# EAGLE board 3xbaseI2C (EAGLE 7.7.0)
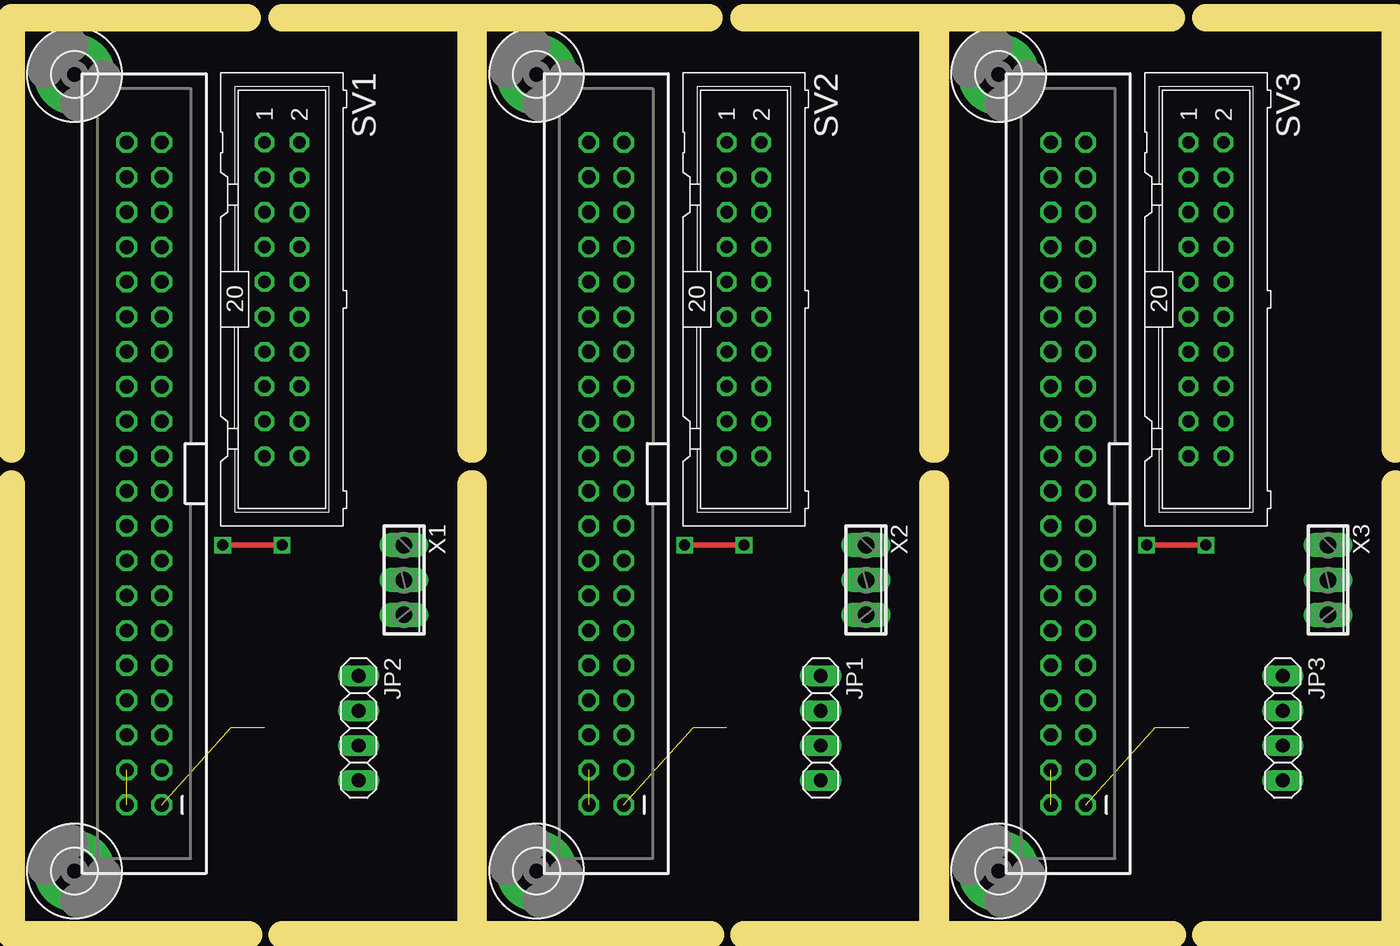
[diagram p0: board, top side]
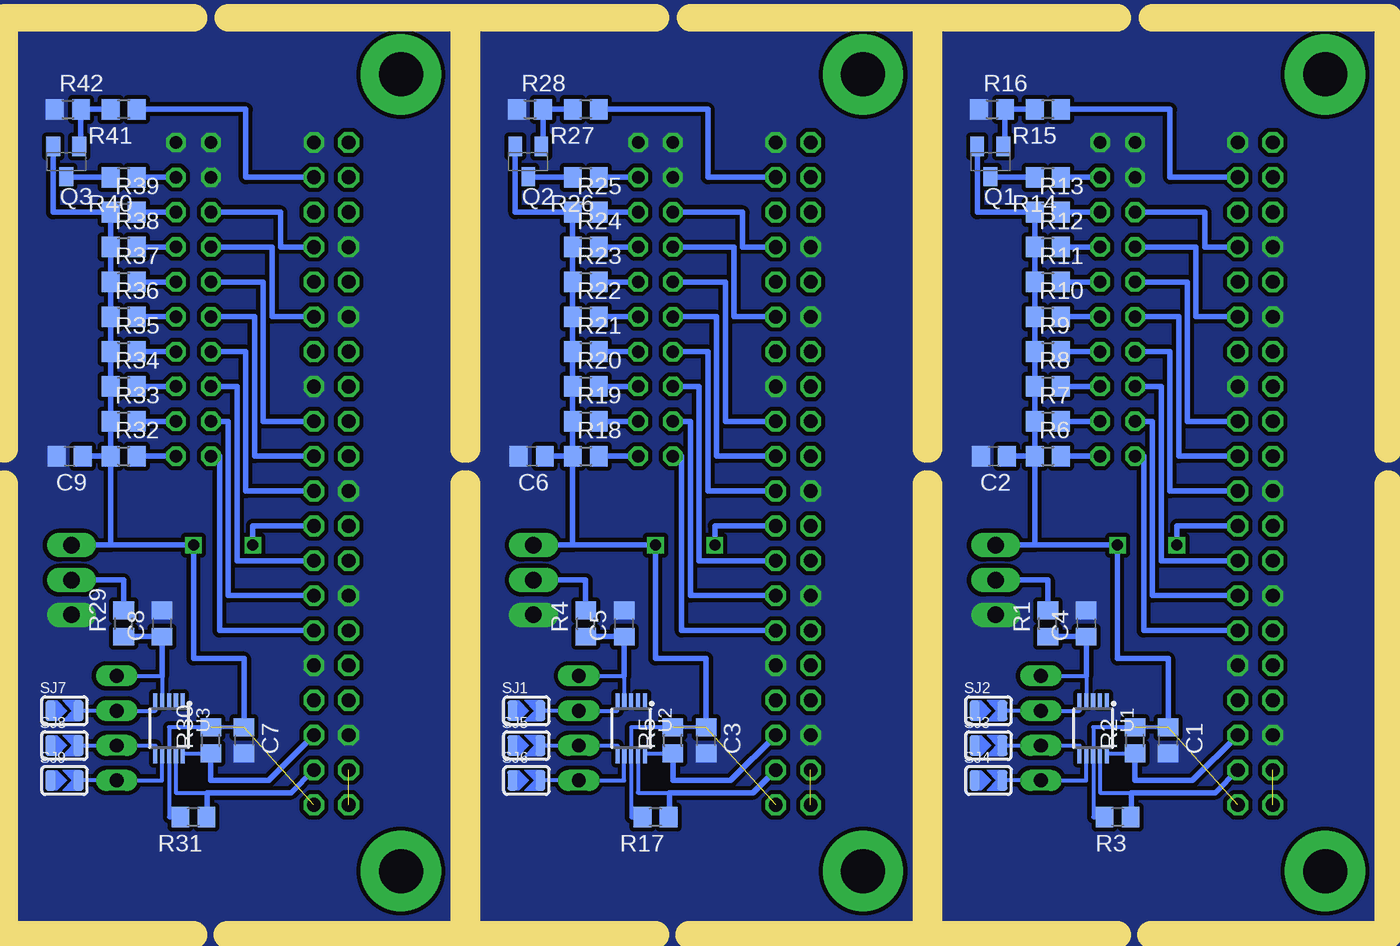
[diagram p1: board, bottom side, seen from below]

No outline drawn. Coordinates in mm, seen from the top.
Copper layers (1*16): Top 0.035mm / dielectric 1.5mm / Bottom 0.035mm
Design rules "default": minimum track width 10mil, minimum drill 24mil, track to track 8mil, track to pad 8mil, pad to pad 8mil, via to via 8mil, smd to smd 8mil, copper to edge 40mil, drill to drill 8mil, minimum pad ring 10mil, minimum via ring 8mil, stop-mask expansion 4mil, vias tented up to drill 0mil, thermal gap 10mil
Milling: 24 lines

## Footprints (pad centres in the part's own frame; a part is rotated, then mirrored left to right if it is on the bottom)
C0805 = smd 1.3 x 1.5: 1 -0.95,0; 2 0.95,0
3,2-PAD = drill 3.2 pad 5.842: B3,2 0,0
2X20-SHROUDED-THIN = drill 1 octagon: 1 -1.27,24.13; 2 1.27,24.13; 3 -1.27,21.59; 4 1.27,21.59; 5 -1.27,19.05; 6 1.27,19.05; 7 -1.27,16.51; 8 1.27,16.51; 9 -1.27,13.97; 10 1.27,13.97; 11 -1.27,11.43; 12 1.27,11.43; 13 -1.27,8.89; 14 1.27,8.89; 15 -1.27,6.35; 16 1.27,6.35; 17 -1.27,3.81; 18 1.27,3.81; 19 -1.27,1.27; 20 1.27,1.27; 21 -1.27,-1.27; 22 1.27,-1.27; 23 -1.27,-3.81; 24 1.27,-3.81; 25 -1.27,-6.35; 26 1.27,-6.35; 27 -1.27,-8.89; 28 1.27,-8.89; 29 -1.27,-11.43; 30 1.27,-11.43; 31 -1.27,-13.97; 32 1.27,-13.97; 33 -1.27,-16.51; 34 1.27,-16.51; 35 -1.27,-19.05; 36 1.27,-19.05; 37 -1.27,-21.59; 38 1.27,-21.59; 39 -1.27,-24.13; 40 1.27,-24.13
1X04 = drill 1.016 long: 1 -3.81,0; 2 -1.27,0; 3 1.27,0; 4 3.81,0
SOT23-BEC = smd 1 x 1.4: B -0.95,-1.1; C 0,1.1; E 0.95,-1.1
R0805 = smd 1.3 x 1.5: 1 -0.95,0; 2 0.95,0
SOLDERJUMPER_ARROW_NOPASTE = smd 0.762 x 1.524: 1 -1.016,0; 2 1.016,0
ML20 = drill 0.914 octagon: 1 -11.43,-1.27; 2 -11.43,1.27; 3 -8.89,-1.27; 4 -8.89,1.27; 5 -6.35,-1.27; 6 -6.35,1.27; 7 -3.81,-1.27; 8 -3.81,1.27; 9 -1.27,-1.27; 10 -1.27,1.27; 11 1.27,-1.27; 12 1.27,1.27; 13 3.81,-1.27; 14 3.81,1.27; 15 6.35,-1.27; 16 6.35,1.27; 17 8.89,-1.27; 18 8.89,1.27; 19 11.43,-1.27; 20 11.43,1.27
MSOP10 = smd 0.3 x 1: 1 -1,-2.05; 2 -0.5,-2.05; 3 0,-2.05; 4 0.5,-2.05; 5 1,-2.05; 6 1,2.05; 7 0.5,2.05; 8 0,2.05; 9 -0.5,2.05; 10 -1,2.05
3POL254 = drill 1.2 long: 1 -2.54,0; 2 0,0; 3 2.54,0

## Placement (x,y rotation side)
C1  0.1uF  [C0805]  17.27,15.62 270 bottom
C2  0.1uF  [C0805]  29.97,36.32 180 bottom
C3  0.1uF  [C0805]  50.93,15.62 270 bottom
C4  0.1uF  [C0805]  23.24,24.13 90 bottom
C5  0.1uF  [C0805]  56.9,24.13 90 bottom
C6  0.1uF  [C0805]  63.63,36.32 180 bottom
C7  0.1uF  [C0805]  84.58,15.62 270 bottom
C8  0.1uF  [C0805]  90.55,24.13 90 bottom
C9  0.1uF  [C0805]  97.28,36.32 180 bottom
H1  MOUNT-PAD-ROUND3.2  [3,2-PAD]  39.5,6.1 90 top
H2  MOUNT-PAD-ROUND3.2  [3,2-PAD]  5.84,6.1 90 top
H3  MOUNT-PAD-ROUND3.2  [3,2-PAD]  5.84,64.14 90 top
H4  MOUNT-PAD-ROUND3.2  [3,2-PAD]  39.5,64.14 90 top
H5  MOUNT-PAD-ROUND3.2  [3,2-PAD]  73.15,6.1 90 top
H6  MOUNT-PAD-ROUND3.2  [3,2-PAD]  73.15,64.14 90 top
J1  RASPBERRYPI-40-PIN-GPIOTHIN  [2X20-SHROUDED-THIN]  44.58,35.05 180 top
J2  RASPBERRYPI-40-PIN-GPIOTHIN  [2X20-SHROUDED-THIN]  10.92,35.05 180 top
J3  RASPBERRYPI-40-PIN-GPIOTHIN  [2X20-SHROUDED-THIN]  78.23,35.05 180 top
JP1  [1X04]  60.2,16.51 270 top
JP2  [1X04]  26.54,16.51 270 top
JP3  [1X04]  93.85,16.51 270 top
Q1  MMBT3906LT1SMD  [SOT23-BEC]  30.23,57.78 180 bottom
Q2  MMBT3906LT1SMD  [SOT23-BEC]  63.88,57.78 180 bottom
Q3  MMBT3906LT1SMD  [SOT23-BEC]  97.54,57.78 180 bottom
R1  10k  [R0805]  26.04,24.13 90 bottom
R2  10k  [R0805]  19.68,15.62 90 bottom
R3  10k  [R0805]  20.95,10.03 180 bottom
R4  10k  [R0805]  59.69,24.13 90 bottom
R5  10k  [R0805]  53.34,15.62 90 bottom
R6  10k  [R0805]  26.04,36.32 0 bottom
R7  10  [R0805]  26.04,38.86 0 bottom
R8  10k  [R0805]  26.04,41.4 0 bottom
R9  10  [R0805]  26.04,43.94 0 bottom
R10  10k  [R0805]  26.04,46.48 0 bottom
R11  10  [R0805]  26.04,49.02 0 bottom
R12  10k  [R0805]  26.04,51.56 0 bottom
R13  10  [R0805]  26.04,54.1 0 bottom
R14  10  [R0805]  26.04,56.64 180 bottom
R15  10k  [R0805]  26.04,61.59 180 bottom
R16  10k  [R0805]  30.1,61.59 0 bottom
R17  10k  [R0805]  54.61,10.03 180 bottom
R18  10k  [R0805]  59.69,36.32 0 bottom
R19  10  [R0805]  59.69,38.86 0 bottom
R20  10k  [R0805]  59.69,41.4 0 bottom
R21  10  [R0805]  59.69,43.94 0 bottom
R22  10k  [R0805]  59.69,46.48 0 bottom
R23  10  [R0805]  59.69,49.02 0 bottom
R24  10k  [R0805]  59.69,51.56 0 bottom
R25  10  [R0805]  59.69,54.1 0 bottom
R26  10  [R0805]  59.69,56.64 180 bottom
R27  10k  [R0805]  59.69,61.59 180 bottom
R28  10k  [R0805]  63.75,61.59 0 bottom
R29  10k  [R0805]  93.34,24.13 90 bottom
R30  10k  [R0805]  87,15.62 90 bottom
R31  10k  [R0805]  88.27,10.03 180 bottom
R32  10k  [R0805]  93.34,36.32 0 bottom
R33  10  [R0805]  93.34,38.86 0 bottom
R34  10k  [R0805]  93.34,41.4 0 bottom
R35  10  [R0805]  93.34,43.94 0 bottom
R36  10k  [R0805]  93.34,46.48 0 bottom
R37  10  [R0805]  93.34,49.02 0 bottom
R38  10k  [R0805]  93.34,51.56 0 bottom
R39  10  [R0805]  93.34,54.1 0 bottom
R40  10  [R0805]  93.34,56.64 180 bottom
R41  10k  [R0805]  93.34,61.59 180 bottom
R42  10k  [R0805]  97.41,61.59 0 bottom
SJ1  [SOLDERJUMPER_ARROW_NOPASTE]  64.01,17.78 0 bottom
SJ2  [SOLDERJUMPER_ARROW_NOPASTE]  30.35,17.78 0 bottom
SJ3  [SOLDERJUMPER_ARROW_NOPASTE]  30.35,15.24 0 bottom
SJ4  [SOLDERJUMPER_ARROW_NOPASTE]  30.35,12.7 0 bottom
SJ5  [SOLDERJUMPER_ARROW_NOPASTE]  64.01,15.24 0 bottom
SJ6  [SOLDERJUMPER_ARROW_NOPASTE]  64.01,12.7 0 bottom
SJ7  [SOLDERJUMPER_ARROW_NOPASTE]  97.66,17.78 0 bottom
SJ8  [SOLDERJUMPER_ARROW_NOPASTE]  97.66,15.24 0 bottom
SJ9  [SOLDERJUMPER_ARROW_NOPASTE]  97.66,12.7 0 bottom
SV1  [ML20]  20.95,47.75 270 top
SV2  [ML20]  54.61,47.75 270 top
SV3  [ML20]  88.27,47.75 270 top
U1  ADS1015  [MSOP10]  22.73,16.51 180 bottom
U2  ADS1015  [MSOP10]  56.39,16.51 180 bottom
U3  ADS1015  [MSOP10]  90.04,16.51 180 bottom
X1  [3POL254]  29.84,27.3 270 top
X2  [3POL254]  63.5,27.3 270 top
X3  [3POL254]  97.16,27.3 270 top

## Library data of the parts
C1-C9 = rcl
H1-H6 = holes
J1-J3 = SparkFun-Boards
JP1-JP3 = pinhead
Q1-Q3 = transistor-pnp
R1-R42 = resistor
SJ1-SJ9 = microbuilder; BOM: EXCLUDE
SV1-SV3 = con-ml; OC_FARNELL: unknown; OC_NEWARK: unknown
U1-U3 = SparkFun-AnalogIC; PROD_ID: IC-12239
X1-X3 = con-phoenix-254; OC_FARNELL: unknown; OC_NEWARK: unknown

## Nets
+3V1: C3.1 C6.1 J1.1 J1.17 Q2.E R5.2 R17.2 R18.1 R19.1 R20.1 R21.1 R22.1 R23.1 R24.1 R25.1 U2.8 X2.1
+3V2: C7.1 C9.1 J3.1 J3.17 Q3.E R30.2 R31.2 R32.1 R33.1 R34.1 R35.1 R36.1 R37.1 R38.1 R39.1 U3.8 X3.1
+3V3: C1.1 C2.1 J2.1 J2.17 Q1.E R2.2 R3.2 R6.1 R7.1 R8.1 R9.1 R10.1 R11.1 R12.1 R13.1 U1.8 X1.1
+5V: J2.2 J2.4
+5V1: J1.2 J1.4
+5V2: J3.2 J3.4
GND: C1.2 C2.2 C4.2 J2.6 J2.9 J2.14 J2.20 J2.25 J2.30 J2.34 J2.39 R16.1 SJ2.1 SJ3.1 SJ4.1 SV1.1 SV1.2 SV1.3 U1.3 X1.3
GND1: C3.2 C5.2 C6.2 J1.6 J1.9 J1.14 J1.20 J1.25 J1.30 J1.34 J1.39 R28.1 SJ1.1 SJ5.1 SJ6.1 SV2.1 SV2.2 SV2.3 U2.3 X2.3
GND2: C7.2 C8.2 C9.2 J3.6 J3.9 J3.14 J3.20 J3.25 J3.30 J3.34 J3.39 R42.1 SJ7.1 SJ8.1 SJ9.1 SV3.1 SV3.2 SV3.3 U3.3 X3.3
L1: J2.13 SV1.17
L2: J2.19 SV1.13
L3: J2.23 SV1.9
L4: J2.33 SV1.5
L5: J2.37 R15.1
L6: J1.13 SV2.17
L7: J1.19 SV2.13
L8: J1.23 SV2.9
L9: J1.33 SV2.5
L10: J1.37 R27.1
L11: J3.13 SV3.17
L12: J3.19 SV3.13
L13: J3.23 SV3.9
L14: J3.33 SV3.5
L15: J3.37 R41.1
N$1: Q1.C R14.2
N$2: Q1.B R15.2 R16.2
N$3: R8.2 SV1.16
N$4: R9.2 SV1.14
N$5: R6.2 SV1.20
N$6: R7.2 SV1.18
N$7: R10.2 SV1.12
N$8: JP2.2 SJ2.2 U1.5
N$9: R1.2 X1.2
N$10: R11.2 SV1.10
N$11: JP2.3 SJ3.2 U1.6
N$12: JP2.4 SJ4.2 U1.7
N$13: R12.2 SV1.8
N$14: R13.2 SV1.6
N$15: R14.1 SV1.4
N$16: R4.2 X2.2
N$17: JP1.2 SJ1.2 U2.5
N$18: JP1.3 SJ5.2 U2.6
N$19: JP1.4 SJ6.2 U2.7
N$20: R18.2 SV2.20
N$21: R19.2 SV2.18
N$22: Q2.C R26.2
N$23: Q2.B R27.2 R28.2
N$24: R20.2 SV2.16
N$25: R21.2 SV2.14
N$26: R22.2 SV2.12
N$27: R23.2 SV2.10
N$28: R24.2 SV2.8
N$29: R25.2 SV2.6
N$30: R26.1 SV2.4
N$31: R29.2 X3.2
N$32: JP3.2 SJ7.2 U3.5
N$33: JP3.3 SJ8.2 U3.6
N$34: JP3.4 SJ9.2 U3.7
N$35: R32.2 SV3.20
N$36: R33.2 SV3.18
N$37: Q3.C R40.2
N$38: Q3.B R41.2 R42.2
N$39: R34.2 SV3.16
N$40: R35.2 SV3.14
N$41: R36.2 SV3.12
N$42: R37.2 SV3.10
N$43: R38.2 SV3.8
N$44: R39.2 SV3.6
N$45: R40.1 SV3.4
SCL: J2.5 R2.1 U1.10
SCL1: J1.5 R5.1 U2.10
SCL2: J3.5 R30.1 U3.10
SDA: J2.3 R3.1 U1.9
SDA1: J1.3 R17.1 U2.9
SDA2: J3.3 R31.1 U3.9
SW1: J2.11 SV1.19
SW2: J2.15 SV1.15
SW3: J2.21 SV1.11
SW4: J2.29 SV1.7
SW5: J1.11 SV2.19
SW6: J1.15 SV2.15
SW7: J1.21 SV2.11
SW8: J1.29 SV2.7
SW9: J3.11 SV3.19
SW10: J3.15 SV3.15
SW11: J3.21 SV3.11
SW12: J3.29 SV3.7
VOL: C4.1 JP2.1 R1.1 U1.4
VOL1: C5.1 JP1.1 R4.1 U2.4
VOL2: C8.1 JP3.1 R29.1 U3.4

## Tracks (layer width: path | path; a pad name or v marks a point on that pad's centre or on a via)
+3V1  (via drill 0.8)  (2 unrouted)
  Top 0.406: v50.29,29.84 v54.61,29.84
  Bottom 0.305: C3.1 56.39,16.58 U2.8 56.39,10.03 R17.2
  Bottom 0.406: R18.1 R19.1 R20.1 R21.1 R22.1 R23.1 R24.1 R25.1 64.83,54.1 Q2.E | R18.1 | C6.1 R18.1 | J1.17 50.29,31.24 v50.29,29.84 | 60.64,29.84 v54.61,29.84 54.61,21.59 50.93,21.59 C3.1 | 60.64,29.84 R18.1 | X2.1 60.64,29.84
+3V2  (via drill 0.8)  (2 unrouted)
  Top 0.406: v83.95,29.84 v88.27,29.84
  Bottom 0.305: C7.1 90.04,16.58 U3.8 90.04,10.03 R31.2
  Bottom 0.406: R32.1 R33.1 R34.1 R35.1 R36.1 R37.1 R38.1 R39.1 98.49,54.1 Q3.E | R32.1 | C9.1 R32.1 | J3.17 83.95,31.24 v83.95,29.84 | 94.3,29.84 v88.27,29.84 88.27,21.59 84.58,21.59 C7.1 | 94.3,29.84 R32.1 | X3.1 94.3,29.84
+3V3  (via drill 0.8)  (2 unrouted)
  Top 0.406: v16.64,29.84 v20.95,29.84
  Bottom 0.305: C1.1 22.73,16.58 U1.8 22.73,10.03 R3.2
  Bottom 0.406: R6.1 R7.1 R8.1 R9.1 R10.1 R11.1 R12.1 R13.1 31.18,54.1 Q1.E | R6.1 | C2.1 R6.1 | J2.17 16.64,31.24 v16.64,29.84 | 26.98,29.84 v20.95,29.84 20.95,21.59 17.27,21.59 C1.1 | 26.98,29.84 R6.1 | X1.1 26.98,29.84
+5V  (1 unrouted)
+5V1  (1 unrouted)
+5V2  (1 unrouted)
GND
  pour Bottom (isolate 0.305, no thermals): 43.81,-41.91 43.81,107.95 -71.75,107.95 -71.75,-41.91
GND1
  pour Bottom (isolate 0.305, no thermals): 77.47,-41.91 77.47,107.95 26.67,107.95 26.67,-41.91
GND2
  pour Bottom (isolate 0.305, no thermals): 154.31,-41.91 154.31,107.95 60.33,107.95 60.33,-41.91
L1
  Bottom 0.406: J2.13 18.41,26.16 18.41,38.86 SV1.17
L2
  Bottom 0.406: J2.19 17.14,33.78 17.14,43.94 SV1.13
L3
  Bottom 0.406: J2.23 15.88,38.86 15.88,49.02 SV1.9
L4
  Bottom 0.406: J2.33 14.61,51.56 14.61,54.1 SV1.5
L5
  Bottom 0.406: R15.1 17.14,61.59 17.14,56.64 J2.37
L6
  Bottom 0.406: J1.13 52.07,26.16 52.07,38.86 SV2.17
L7
  Bottom 0.406: J1.19 50.8,33.78 50.8,43.94 SV2.13
L8
  Bottom 0.406: J1.23 49.53,38.86 49.53,49.02 SV2.9
L9
  Bottom 0.406: J1.33 48.26,51.56 48.26,54.1 SV2.5
L10
  Bottom 0.406: R27.1 50.8,61.59 50.8,56.64 J1.37
L11
  Bottom 0.406: J3.13 85.72,26.16 85.72,38.86 SV3.17
L12
  Bottom 0.406: J3.19 84.45,33.78 84.45,43.94 SV3.13
L13
  Bottom 0.406: J3.23 83.19,38.86 83.19,49.02 SV3.9
L14
  Bottom 0.406: J3.33 81.92,51.56 81.92,54.1 SV3.5
L15
  Bottom 0.406: R41.1 84.45,61.59 84.45,56.64 J3.37
N$1
  Bottom 0.406: Q1.C 30.18,56.64 R14.2
N$2
  Bottom 0.406: R15.2 R16.2 29.15,59.01 Q1.B
N$3
  Bottom 0.406: R8.2 SV1.16
N$4
  Bottom 0.406: SV1.14 R9.2
N$5
  Bottom 0.406: R6.2 SV1.20
N$6
  Bottom 0.406: SV1.18 R7.2
N$7
  Bottom 0.406: R10.2 SV1.12
N$8
  Bottom 0.305: SJ2.2 JP2.2 23.73,17.78 U1.5
N$9
  Bottom 0.406: X1.2 26.04,27.3 R1.2
N$10
  Bottom 0.406: SV1.10 R11.2
N$11
  Bottom 0.305: SJ3.2 JP2.3 23.73,15.24 U1.6
N$12
  Bottom 0.305: U1.7 23.23,12.7 JP2.4 SJ4.2
N$13
  Bottom 0.406: R12.2 SV1.8
N$14
  Bottom 0.406: SV1.6 R13.2
N$15
  Bottom 0.406: R14.1 SV1.4
N$16
  Bottom 0.406: X2.2 59.69,27.3 R4.2
N$17
  Bottom 0.305: SJ1.2 JP1.2 57.39,17.78 U2.5
N$18
  Bottom 0.305: SJ5.2 JP1.3 57.39,15.24 U2.6
N$19
  Bottom 0.305: U2.7 56.89,12.7 JP1.4 SJ6.2
N$20
  Bottom 0.406: R18.2 SV2.20
N$21
  Bottom 0.406: SV2.18 R19.2
N$22
  Bottom 0.406: Q2.C 63.84,56.64 R26.2
N$23
  Bottom 0.406: R27.2 R28.2 62.8,59.01 Q2.B
N$24
  Bottom 0.406: R20.2 SV2.16
N$25
  Bottom 0.406: SV2.14 R21.2
N$26
  Bottom 0.406: R22.2 SV2.12
N$27
  Bottom 0.406: SV2.10 R23.2
N$28
  Bottom 0.406: R24.2 SV2.8
N$29
  Bottom 0.406: SV2.6 R25.2
N$30
  Bottom 0.406: R26.1 SV2.4
N$31
  Bottom 0.406: X3.2 93.34,27.3 R29.2
N$32
  Bottom 0.305: SJ7.2 JP3.2 91.04,17.78 U3.5
N$33
  Bottom 0.305: SJ8.2 JP3.3 91.04,15.24 U3.6
N$34
  Bottom 0.305: U3.7 90.54,12.7 JP3.4 SJ9.2
N$35
  Bottom 0.406: R32.2 SV3.20
N$36
  Bottom 0.406: SV3.18 R33.2
N$37
  Bottom 0.406: Q3.C 97.49,56.64 R40.2
N$38
  Bottom 0.406: R41.2 R42.2 96.46,59.01 Q3.B
N$39
  Bottom 0.406: R34.2 SV3.16
N$40
  Bottom 0.406: SV3.14 R35.2
N$41
  Bottom 0.406: R36.2 SV3.12
N$42
  Bottom 0.406: SV3.10 R37.2
N$43
  Bottom 0.406: R38.2 SV3.8
N$44
  Bottom 0.406: SV3.6 R39.2
N$45
  Bottom 0.406: R40.1 SV3.4
SCL
  Bottom 0.305: U1.10 21.73,14.67 R2.1
  Bottom 0.406: R2.1 19.68,12.7 15.49,12.7 J2.5
SCL1
  Bottom 0.305: U2.10 55.39,14.67 R5.1
  Bottom 0.406: R5.1 53.34,12.7 49.15,12.7 J1.5
SCL2
  Bottom 0.305: U3.10 89.04,14.67 R30.1
  Bottom 0.406: R30.1 87,12.7 82.8,12.7 J3.5
SDA
  Bottom 0.305: U1.9 22.23,11.81 19.94,11.81
  Bottom 0.406: J2.3 13.84,11.81 19.94,11.81 19.94,10.1 R3.1
SDA1
  Bottom 0.305: U2.9 55.89,11.81 53.59,11.81
  Bottom 0.406: J1.3 47.5,11.81 53.59,11.81 53.59,10.1 R17.1
SDA2
  Bottom 0.305: U3.9 89.54,11.81 87.25,11.81
  Bottom 0.406: J3.3 81.15,11.81 87.25,11.81 87.25,10.1 R31.1
SW1
  Bottom 0.406: J2.11 19.05,23.62 19.05,36.32 SV1.19
SW2
  Bottom 0.406: J2.15 17.78,28.7 17.78,41.4 SV1.15
SW3
  Bottom 0.406: J2.21 16.51,36.32 16.51,46.48 SV1.11
SW4
  Bottom 0.406: J2.29 15.24,46.48 15.24,51.56 SV1.7
SW5
  Bottom 0.406: J1.11 52.7,23.62 52.7,36.32 SV2.19
SW6
  Bottom 0.406: J1.15 51.44,28.7 51.44,41.4 SV2.15
SW7
  Bottom 0.406: J1.21 50.16,36.32 50.16,46.48 SV2.11
SW8
  Bottom 0.406: J1.29 48.9,46.48 48.9,51.56 SV2.7
SW9
  Bottom 0.406: J3.11 86.36,23.62 86.36,36.32 SV3.19
SW10
  Bottom 0.406: J3.15 85.09,28.7 85.09,41.4 SV3.15
SW11
  Bottom 0.406: J3.21 83.82,36.32 83.82,46.48 SV3.11
SW12
  Bottom 0.406: J3.29 82.55,46.48 82.55,51.56 SV3.7
VOL
  Bottom 0.305: JP2.1 23.23,20.32 U1.4
  Bottom 0.406: R1.1 C4.1 23.24,20.32 23.23,20.32
VOL1
  Bottom 0.305: JP1.1 56.89,20.32 U2.4
  Bottom 0.406: R4.1 C5.1 56.9,20.32 56.89,20.32
VOL2
  Bottom 0.305: JP3.1 90.54,20.32 U3.4
  Bottom 0.406: R29.1 C8.1 90.55,20.32 90.54,20.32